# EAGLE board D1MSHO (EAGLE 8.4.3)
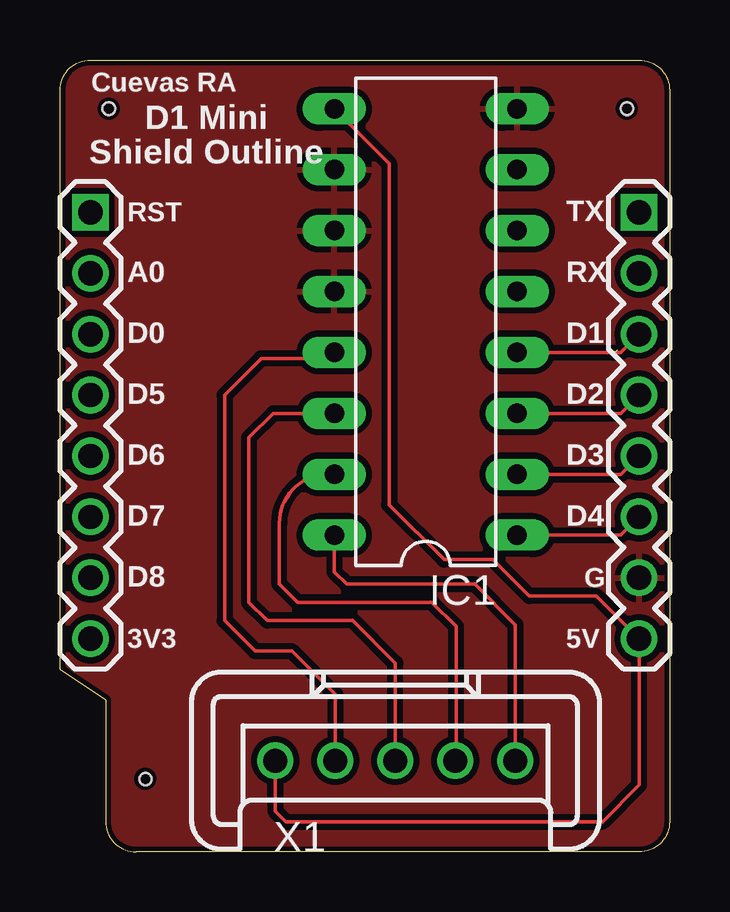
[diagram p0: board, top side]
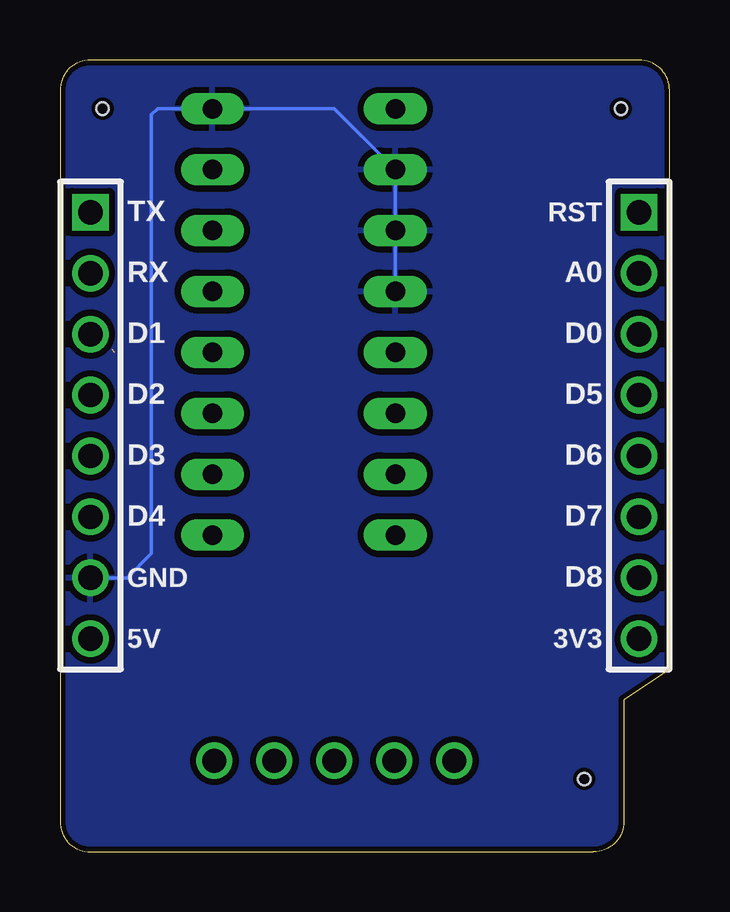
[diagram p1: board, bottom side, seen from below]

Size 25.4 x 33.02 mm. Coordinates in mm from the lower left corner, seen from the top.
Outline: 25.4,31.75 25.4,1.27 arc-90 24.13,0 3.17,0 arc-90 1.91,1.27 1.91,6.35 0,7.62 0,31.75 arc-90 1.27,33.02 24.13,33.02 arc-90 25.4,31.75
Copper layers (1*16): Top 0.035mm / dielectric 1.5mm / Bottom 0.035mm
Design rules "ElectroDragon_2layer_DRU_no_angle_20140221 *": minimum track width 5mil, minimum drill 12mil, track to track 6mil, track to pad 6mil, pad to pad 6mil, via to via 6mil, smd to smd 6mil, copper to edge 8mil, drill to drill 6mil, minimum pad ring 10mil, minimum via ring 6mil, stop-mask expansion 4mil, vias tented up to drill 100mil, thermal gap 10mil
Net classes: 0 default: width 0.305 mm, drill 0.508 mm, clearance 0.254 mm; 1 power: width 0.203 mm, clearance 0.152 mm
Holes 0.51 mm at 23.62,30.99 3.56,3.05 2.03,30.99

## Footprints (pad centres in the part's own frame; a part is rotated, then mirrored left to right if it is on the bottom)
1X08 = drill 1.016 square: 1 0,0 | drill 1.016: 2 2.54,0; 3 5.08,0; 4 7.62,0; 5 10.16,0; 6 12.7,0; 7 15.24,0; 8 17.78,0
DIL16 = drill 0.813 long: 1 -8.89,-3.81; 2 -6.35,-3.81; 3 -3.81,-3.81; 4 -1.27,-3.81; 5 1.27,-3.81; 6 3.81,-3.81; 7 6.35,-3.81; 8 8.89,-3.81; 9 8.89,3.81; 10 6.35,3.81; 11 3.81,3.81; 12 1.27,3.81; 13 -1.27,3.81; 14 -3.81,3.81; 15 -6.35,3.81; 16 -8.89,3.81
MKS1855-6-0-505 = drill 1 pad 1.422: 1 -5,0; 2 -2.5,0; 3 0,0; 4 2.5,0; 5 5,0

## Placement (x,y rotation side)
H1  [1X08]  1.27,26.67 270 top
H2  [1X08]  24.13,26.67 270 top
IC1  ULN2003AN  [DIL16]  15.24,22.1 90 top
X1  MKS1855-6-0-505  [MKS1855-6-0-505]  13.97,3.81 0 top

## Library data of the parts
H1 H2 = freetronics-original
IC1 = uln-udn
X1 = con-stocko; OC_FARNELL: 1134508; OC_NEWARK: unknown

## Nets
3.3V: H1.8
5V: H2.8 IC1.9 X1.1
A0: H1.2
D0: H1.3
D1: H2.3 IC1.4
D2: H2.4 IC1.3
D3: H2.5 IC1.2
D4: H2.6 IC1.1
D5: H1.4
D6: H1.5
D7: H1.6
D8: H1.7
GND: H2.7 IC1.8 IC1.10 IC1.11 IC1.12
N$5: IC1.16 X1.5
N$6: IC1.15 X1.4
N$7: IC1.14 X1.3
N$8: IC1.13 X1.2
RST: H1.1
RX: H2.2
TX: H2.1

## Tracks (layer width: path | path; a pad name or v marks a point on that pad's centre or on a via)
5V
  Top 0.152: 8.97,1.95 X1.1 8.97,1.7 9.4,1.27 22.61,1.27 24.13,2.79 H2.8 22.35,10.67 19.56,10.67 18.03,12.19 16,12.19 13.72,14.48 13.72,28.7 IC1.9
D1
  Top 0.152: IC1.4 23.37,20.83 H2.3
D2
  Top 0.152: IC1.3 23.37,18.29 H2.4
D3
  Top 0.152: IC1.2 23.37,15.75 H2.5
D4
  Top 0.152: IC1.1 23.37,13.21 H2.6
GND
  Bottom 0.152: H2.7 22.61,11.43 21.59,12.45 21.59,19.05 | 21.59,19.05 21.59,19.3 | IC1.12 IC1.11 IC1.10 13.97,30.99 IC1.8 21.34,30.99 21.59,30.73 21.59,19.05
  pour Top: 25.4,31.75 arc90 24.13,33.02 1.27,33.02 arc90 0,31.75 0,7.62 1.91,6.35 1.91,1.27 arc90 3.17,0 24.13,0 arc90 25.4,1.27
  pour Bottom: 25.4,1.27 25.4,31.75 arc90 24.13,33.02 1.27,33.02 arc90 0,31.75 0,7.62 1.91,6.35 1.91,1.27 arc90 3.17,0 24.13,0 arc90
N$4  (1 unrouted)
N$5
  Top 0.152: IC1.16 11.43,11.68 11.94,11.18 17.27,11.18 18.97,9.48 X1.5
N$6
  Top 0.152: X1.4 16.51,3.85 16.51,9.4 15.49,10.41 9.91,10.41 9.14,11.18 9.14,13.72 arc-97 IC1.15
N$7
  Top 0.152: IC1.14 8.89,18.29 7.87,17.27 7.87,10.41 8.64,9.65 12.19,9.65 13.97,7.87 X1.3
N$8
  Top 0.152: IC1.13 11.18,20.57 8.38,20.57 6.86,19.05 6.86,9.65 8.13,8.38 9.65,8.38 11.47,6.56 X1.2

## Text on the board
tPlace: Cuevas RA | D1 Mini / Shield Outline | RST | TX | A0 | RX | D0 | D1 | D5 | D2 | D6 | D3 | D7 | D4 | D8 | G | 3V3 | 5V
bPlace: RST | TX | A0 | RX | D0 | D1 | D5 | D2 | D6 | D3 | D7 | D4 | D8 | GND | 3V3 | 5V